# Altium PCB Smartmcu.PcbDoc
Units mil, origin at the board's own origin, x right, y up, seen from the top; angles counter-clockwise.
Board outline 2181.1 x 1846.46 mil, 4 copper layers (Top Layer, GND Layer, 3V3, Bottom Layer), stack 23.756 mil thick; 88 components, 43 nets, 255 pads, 86 vias.
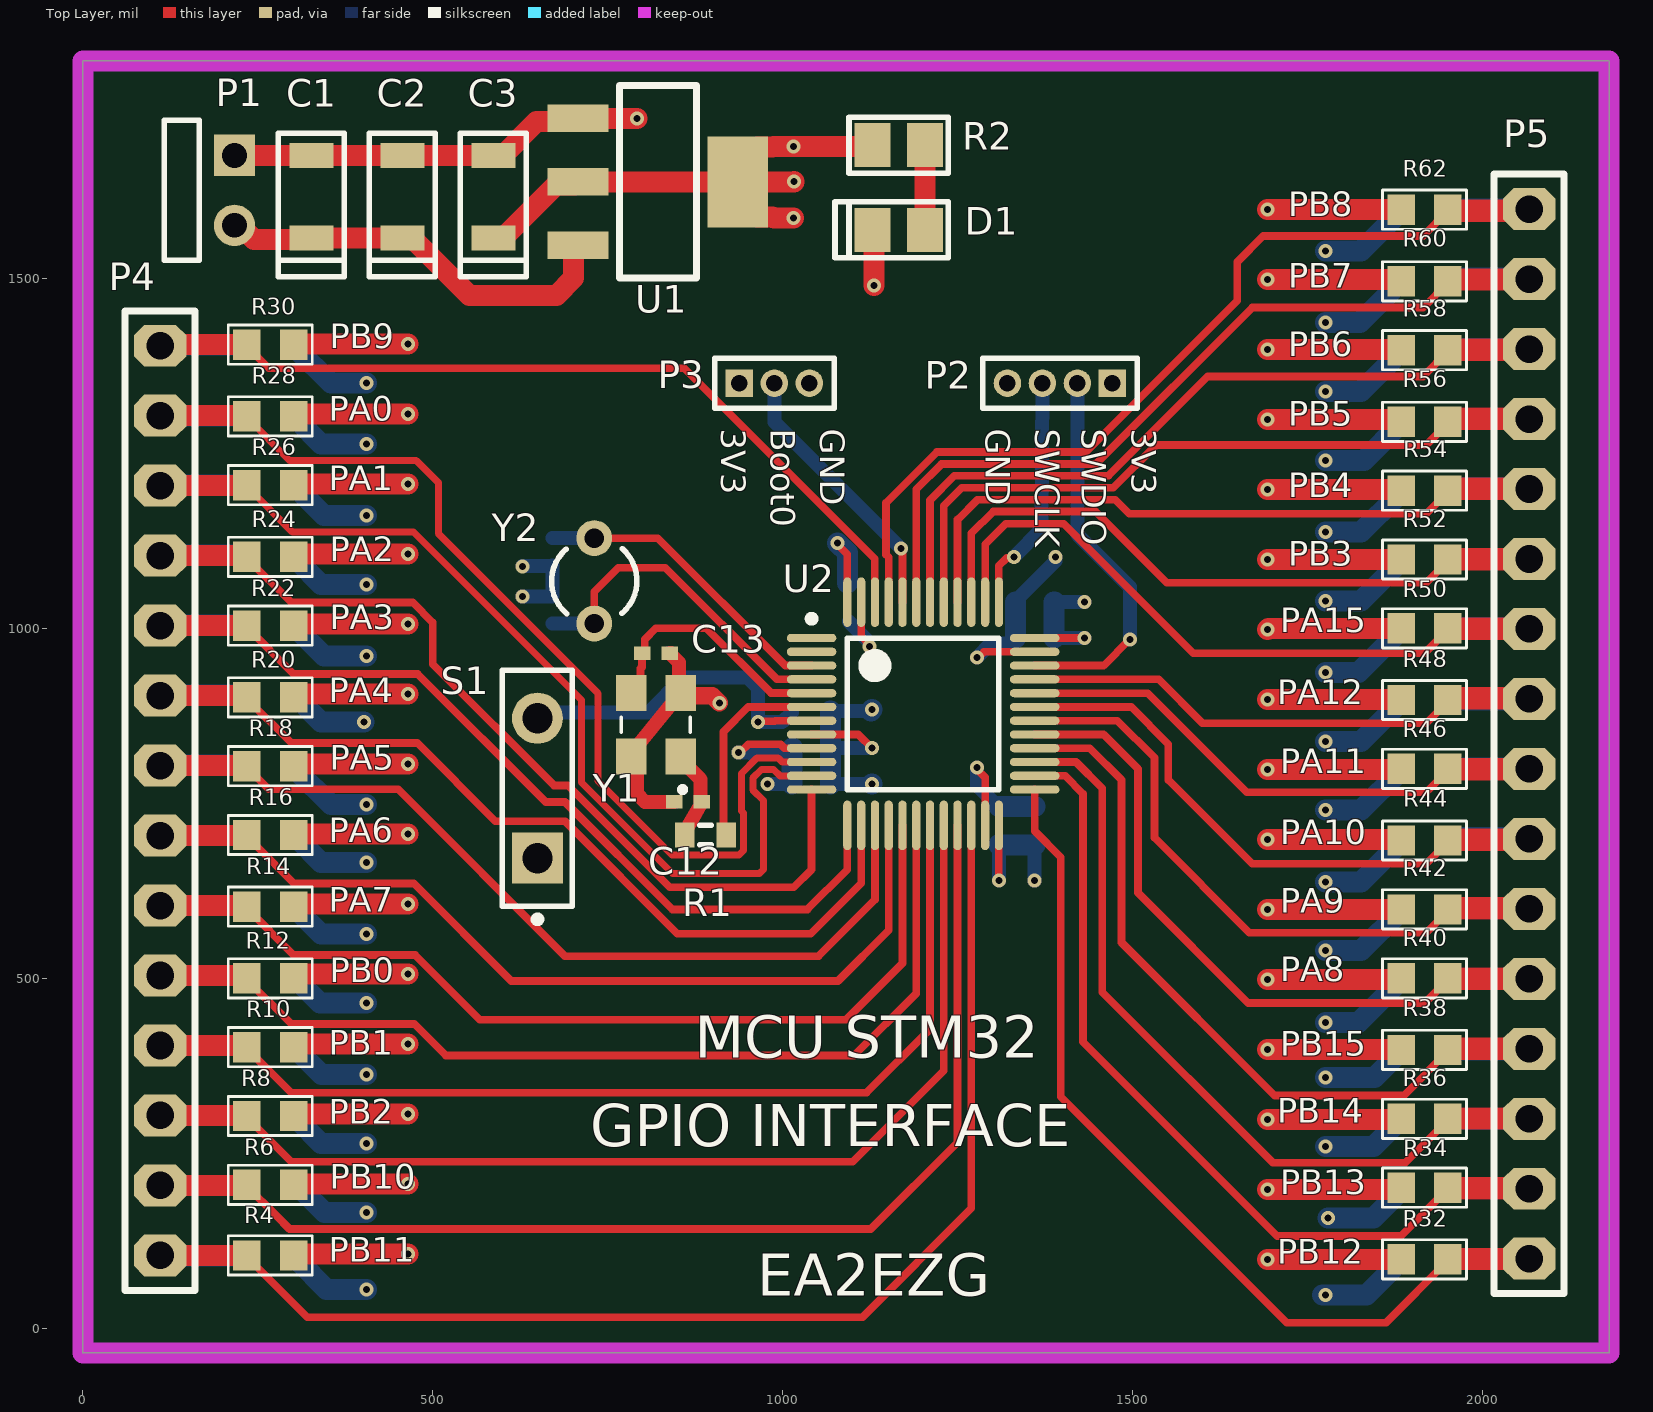
[diagram p0: Top Layer view]
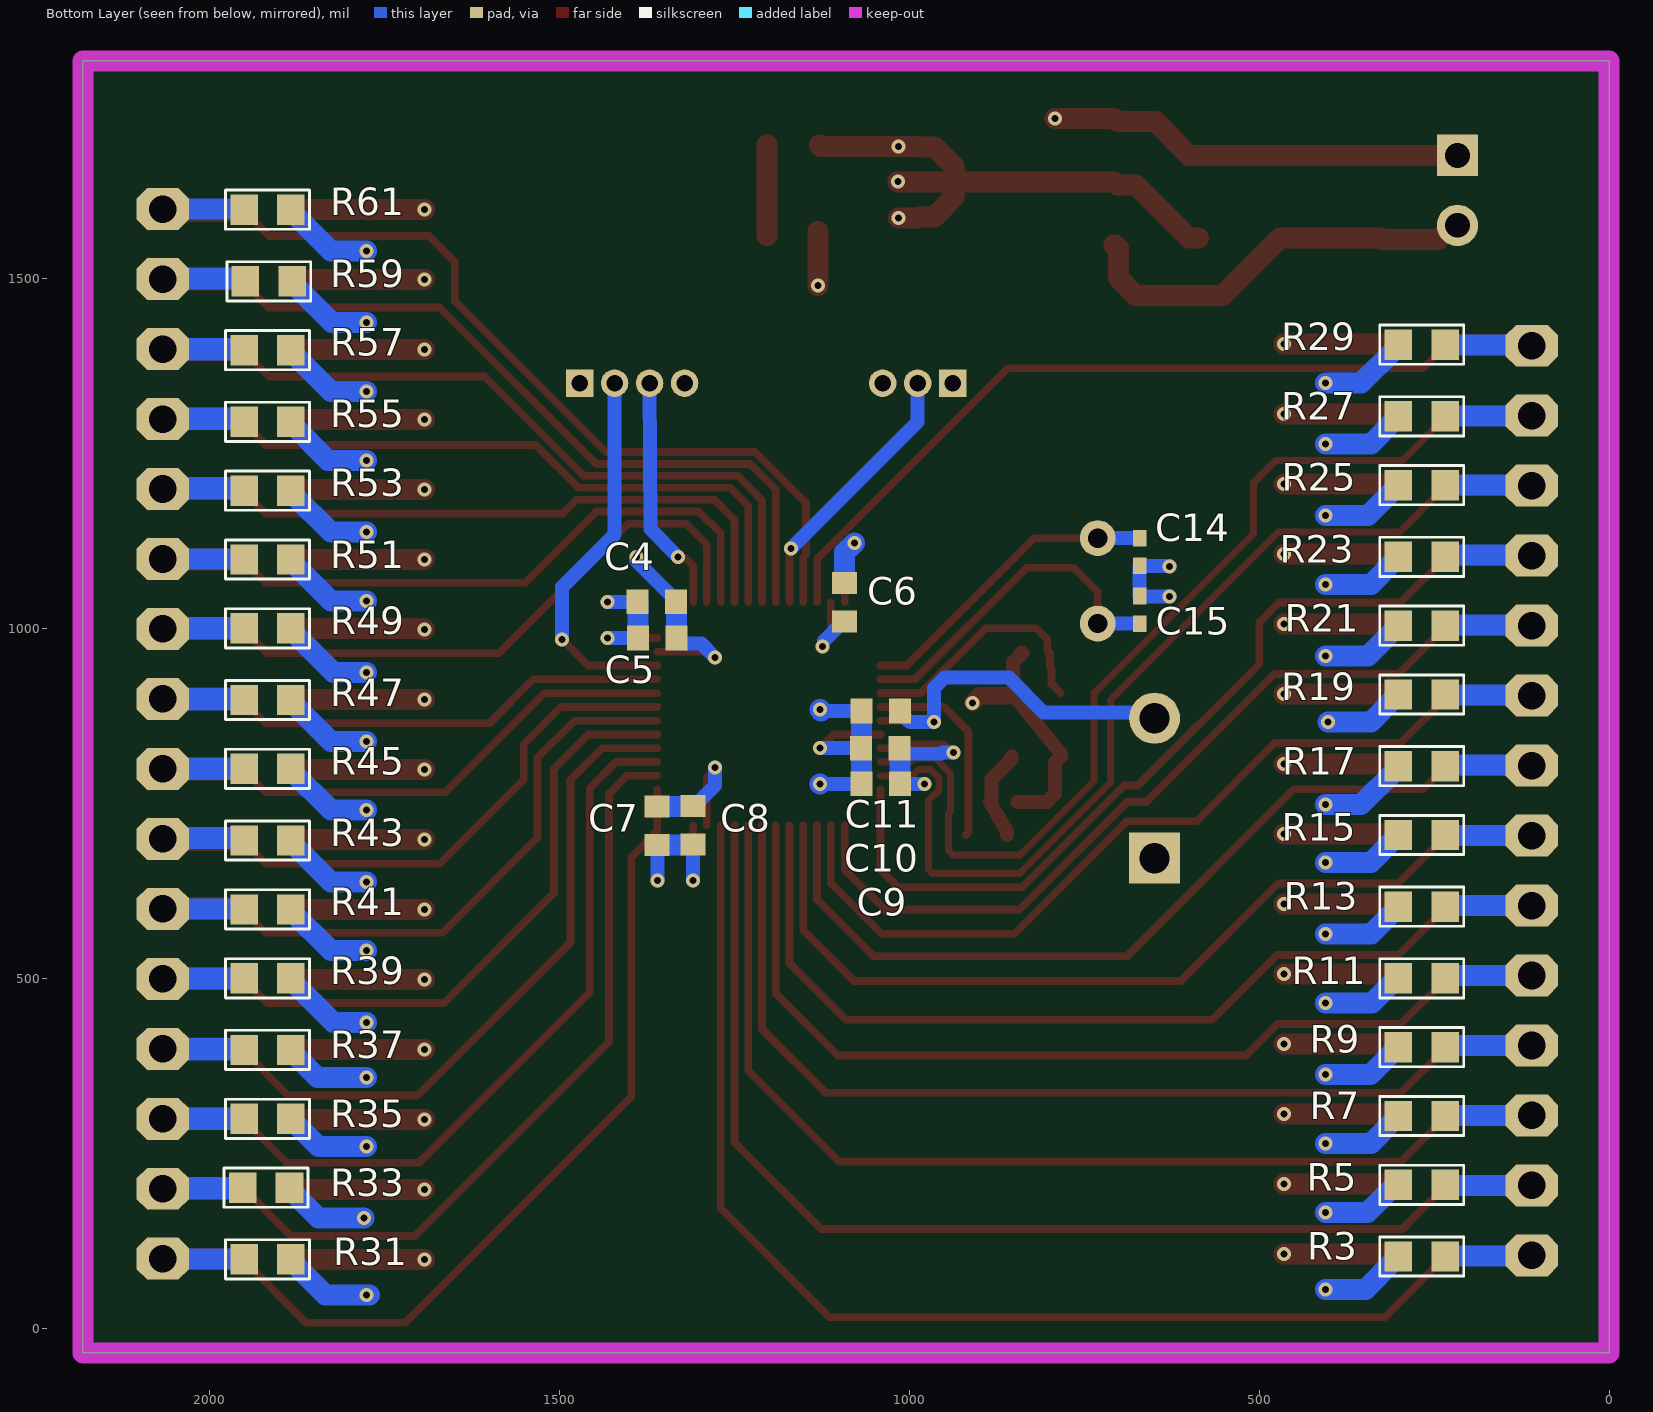
[diagram p1: Bottom Layer view, seen from below]
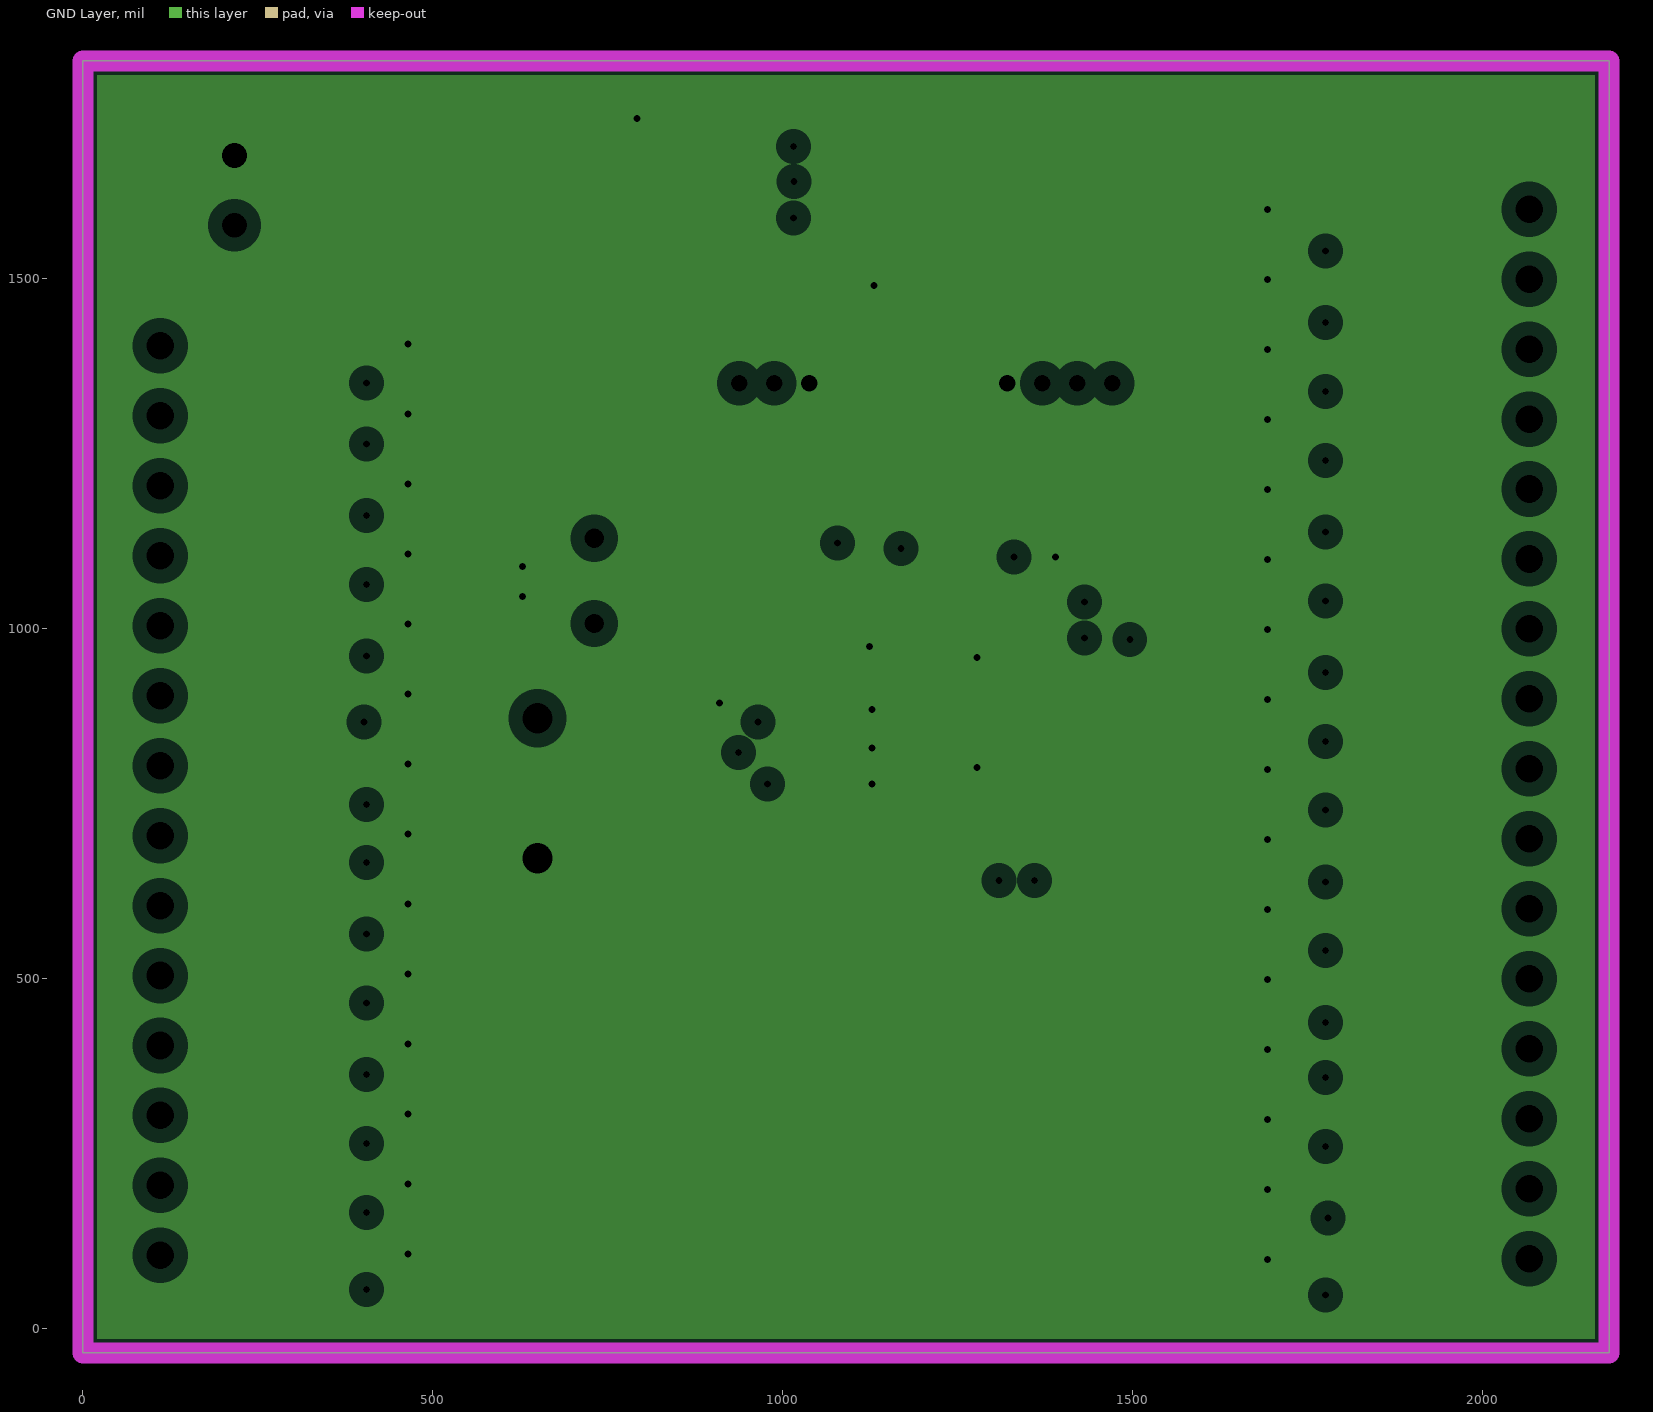
[diagram p2: GND Layer, clearances drawn from the general rule]
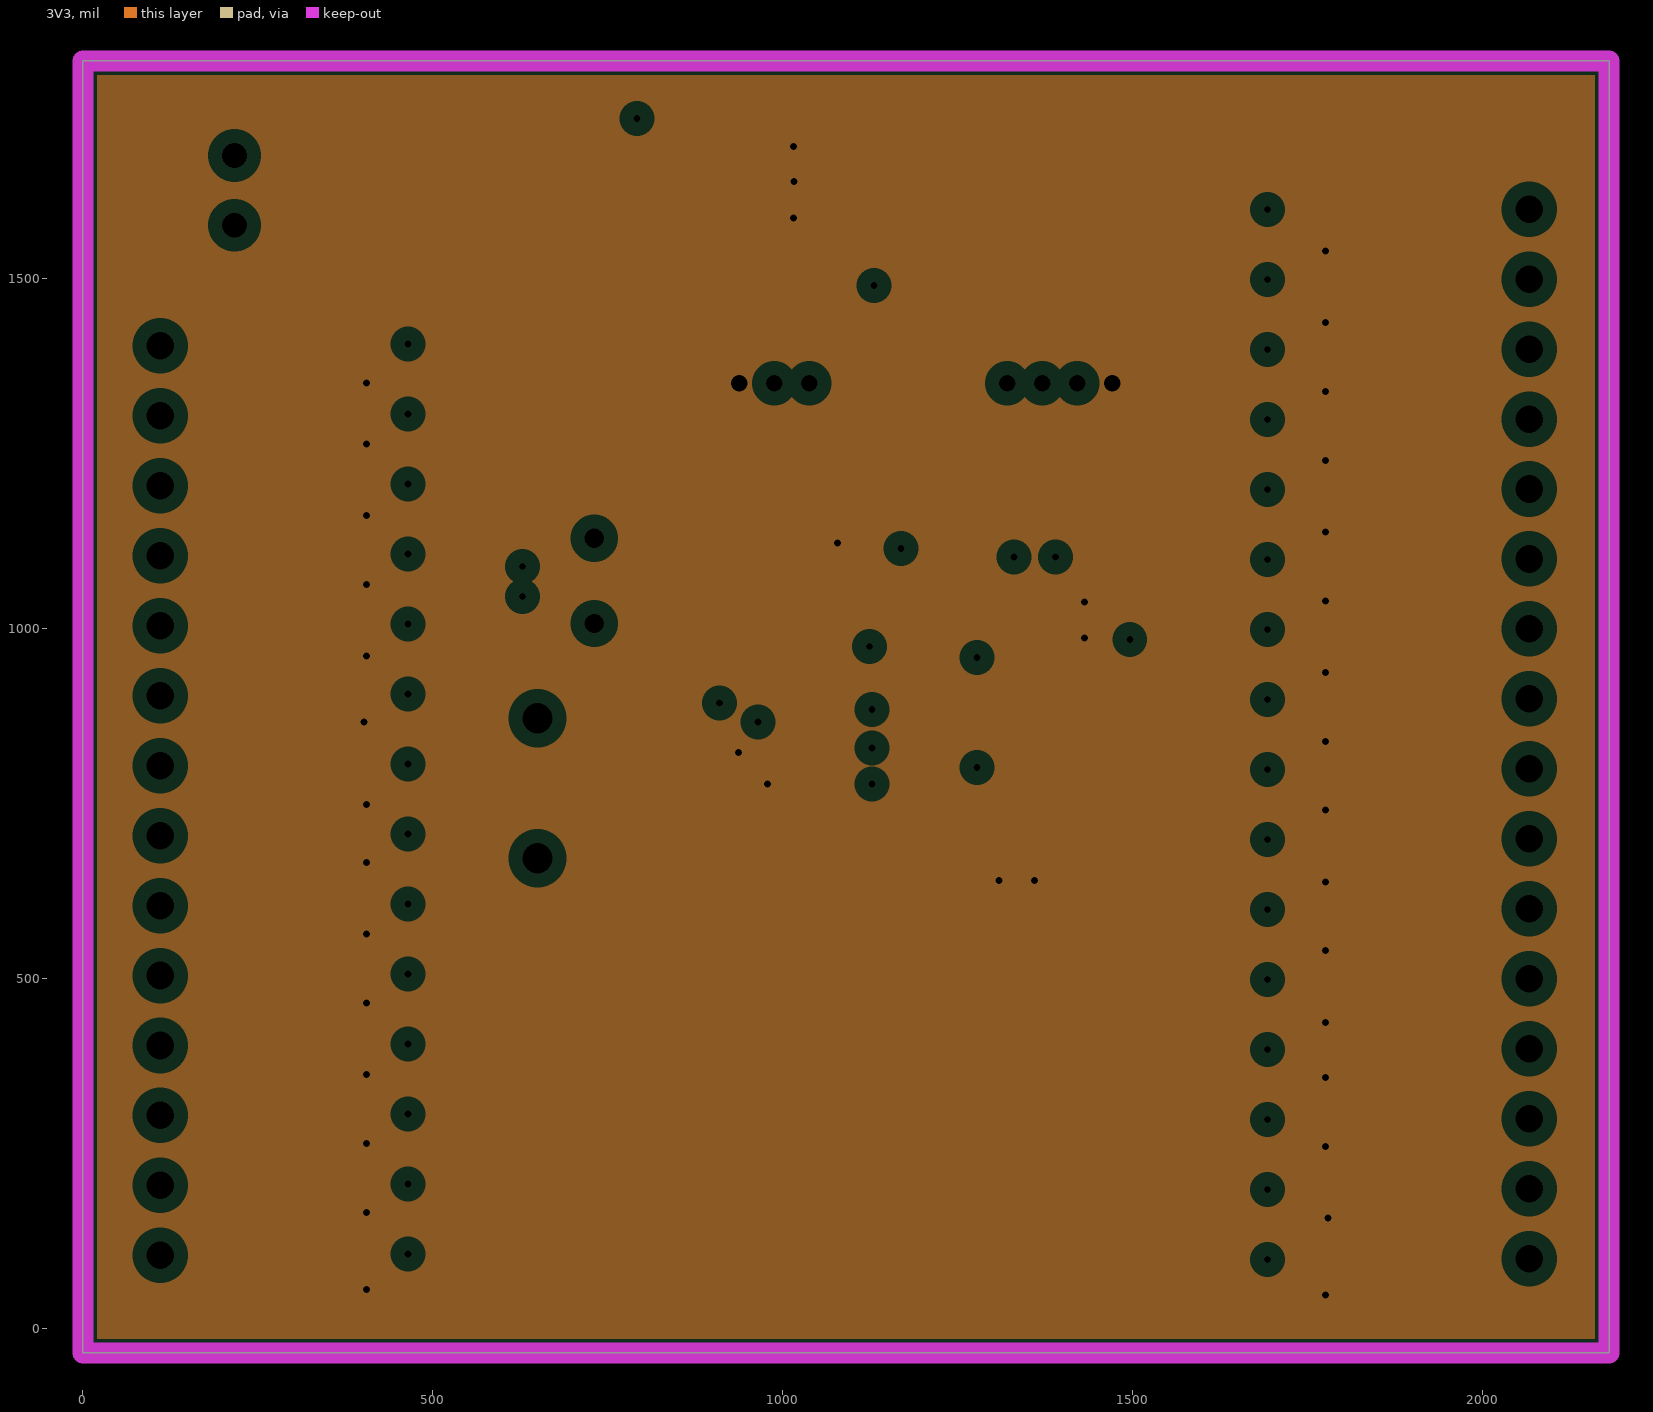
[diagram p3: 3V3, clearances drawn from the general rule]
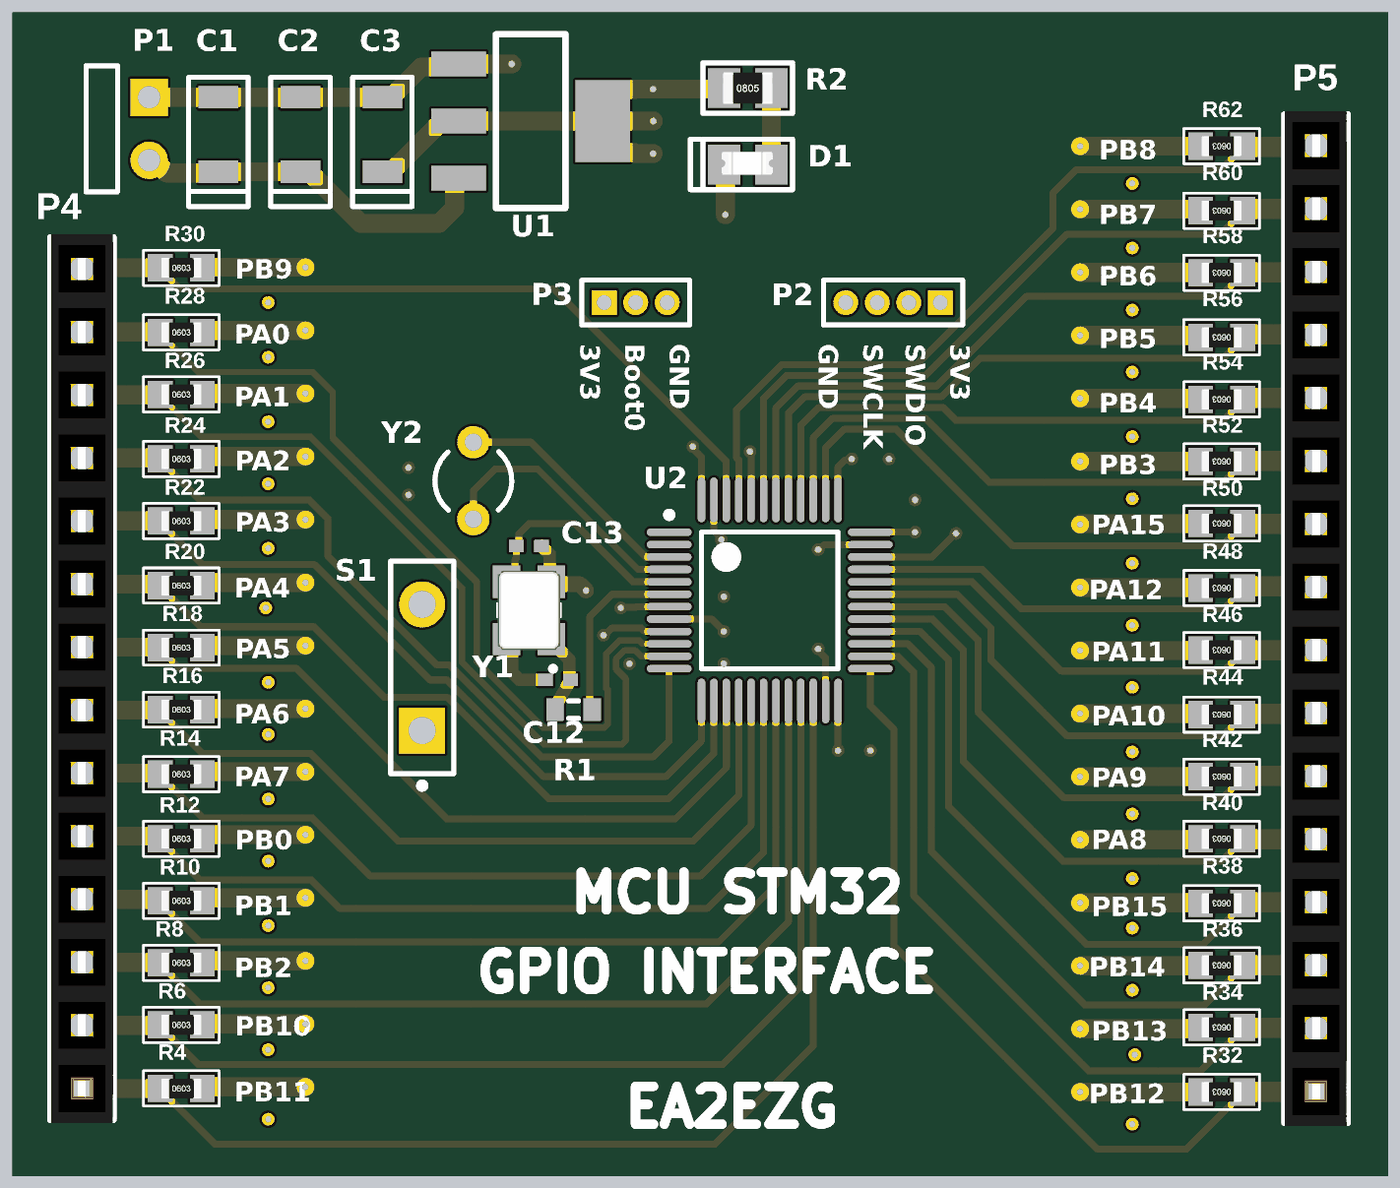
[diagram p4: 3D render of the assembled board from above, using the file's embedded part models]
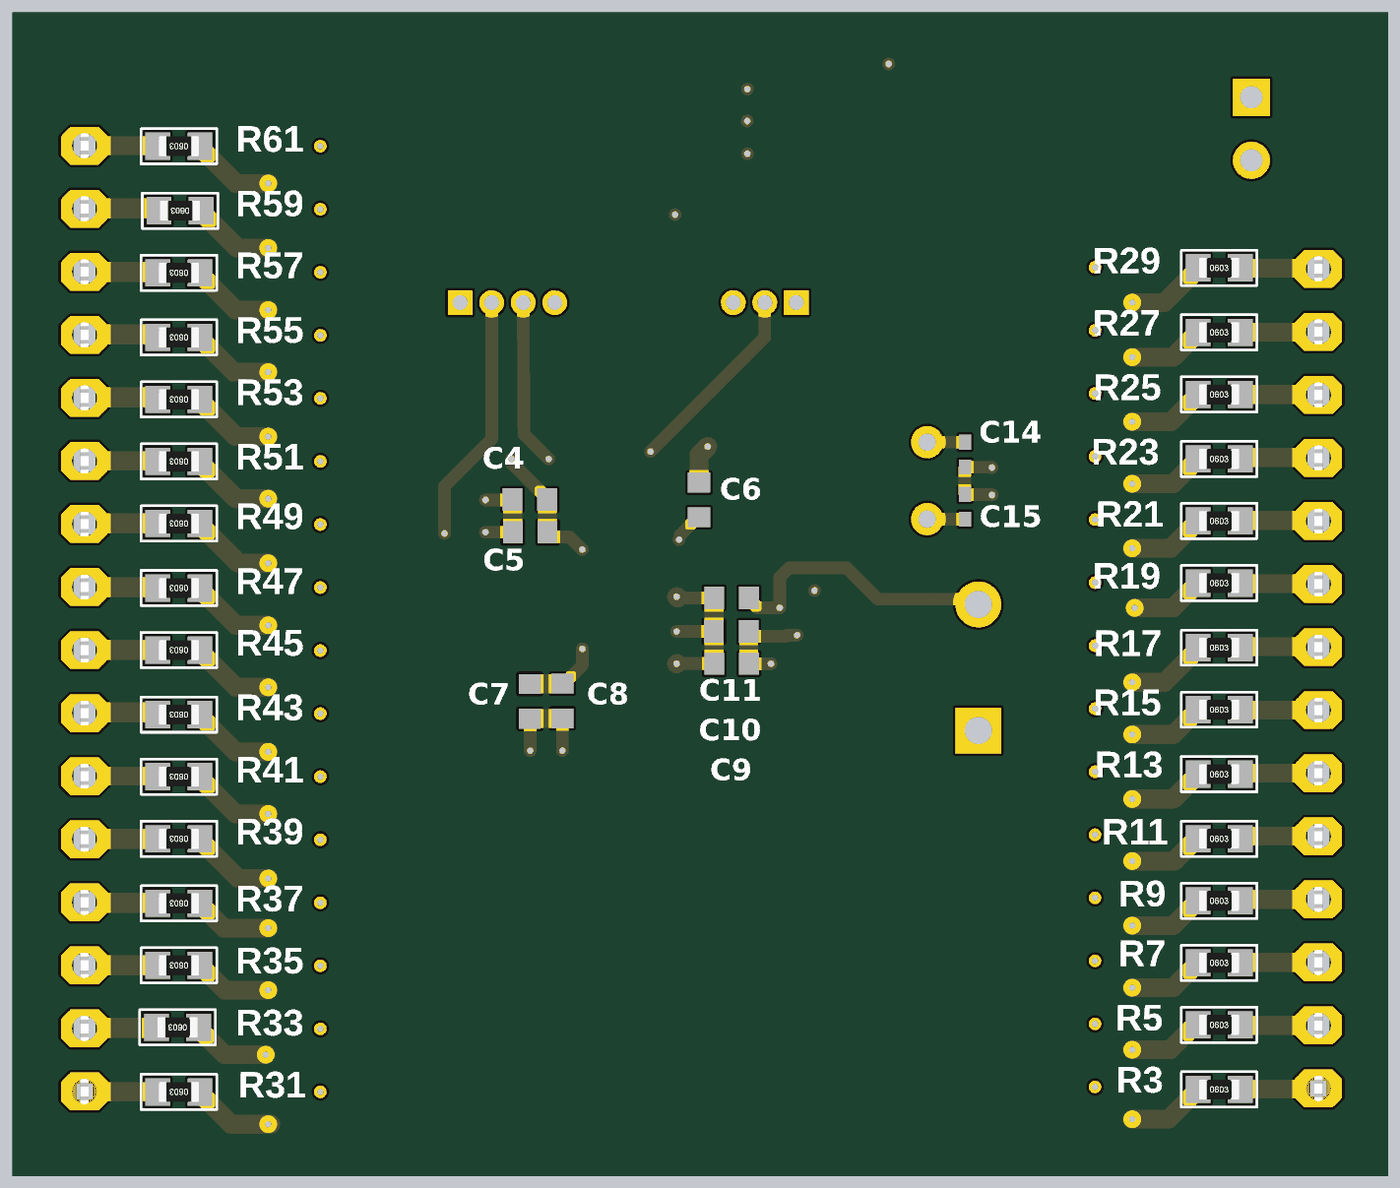
[diagram p5: 3D render of the assembled board from below, using the file's embedded part models]

## Layer stack, top to bottom
Top Solder: solder mask 0.4, Solder Resist, Dk 3.5
Top Layer: signal copper 1.4
Dielectric 2: prepreg 2.8, PP-006, Dk 4.1
GND Layer: plane copper 1.378, net GND
Dielectric 1: dielectric 12.6, FR-4, Dk 4.8
3V3: plane copper 1.378, net +3.3V
Dielectric 3: prepreg 2.8, PP-006, Dk 4.1
Bottom Layer: signal copper 1.4
Bottom Solder: solder mask 0.4, Solder Resist, Dk 3.5

## Board outline
0,-35.43 2181.1,-35.43 2181.1,1811.02 0,1811.02

## Design rules (kind name [scope] priority, off if disabled: settings)
Clearance [All] p1: gap=6 ignorepadtopadclearanceinfootprint=FALSE
ComponentClearance "Ignorar Y1/C12" [InComponent('Y1') vs InComponent('C12')] p1: gap=10 collisioncheckmode=3 verticalgap=10 showdistances=FALSE donotcheckwithout3dbody=TRUE
ComponentClearance ComponentClearance_1 [HasFootprint('4-PIN SOT') vs InComponent('U1')] p2: gap=3.94 collisioncheckmode=3 verticalgap=3.94 showdistances=FALSE
PlaneClearance [All] p1: clearance=20
PlaneConnect [All] p1: planeconnectstyle=Direct reliefexpansion=20 reliefentries=4 reliefconductorwidth=10 reliefairgap=10
PolygonConnect [All] p1: connectstyle=Direct reliefconductorwidth=10 reliefentries=4 polygonreliefangle="90 Angle" airgapwidth=10
RoutingVias [All] p1: holewidth=10 width=20 viastyle="Through Hole" minholewidth=10 minwidth=20 maxholewidth=28 maxwidth=50
ShortCircuit [All] p1: allowed=TRUE
SolderMaskExpansion [All] p1: expansion=4 istentingtop=FALSE
UnConnectedPin [All] p1:
Width [All] p1: maxlimit=40 minlimit=10 preferedwidth=10
26 further rules are at their usual default settings.

## Classes and differential pairs
component class MCU: C4 C5 C6 C7 C8 C9 C10 C11 C12 C13 C14 C15 P2 P3 P4 P5 R1 R3 R4 R5 R6 R7 R8 R9 R10 R11 R12 R13 R14 R15 R16 R17 R18 R19 R20 R21 R22 R23 R24 R25 R26 R27 R28 R29 R30 R31 R32 R33 R34 R35 R36 R37 R38 R39 R40 R41 R42 R43 R44 R45 R46 R47 R48 R49 R50 R51 R52 R53 R54 R55 R56 R57 R58 R59 R60 R61 R62 S1 U2 Y1 Y2
component class PowerSupply: C1 C2 C3 D1 P1 R2 U1

## Components (designator, comment, footprint, x,y, rotation, side; value= is the part's Value field where it differs from the comment)
C1 "Cap Semi" C1206 279.37,1707.51 r270 top value=100nF
C2 "Tantalum Cap" C1206 409.37,1707.51 r270 top value=10uF
C3 "Tantalum Cap" C1206 539.37,1707.51 r270 top value=100uF
C4 "Cap Semi" 1608[0603] 1360.79,1037.95 r0 bottom value=100nF
C5 "Cap Semi" 1608[0603] 1360.24,986.22 r0 bottom value=100nF
C6 "Cap Semi" 1608[0603] 1092.52,1037.4 r90 bottom value=100nF
C7 "Cap Semi" 1608[0603] 1360.79,717.95 r270 bottom value=100nF
C8 "Cap Semi" 1608[0603] 1309.05,718.5 r270 bottom value=4.7uF
C9 "Cap Semi" 1608[0603] 1040.79,777.95 r180 bottom value=10nF
C10 "Cap Semi" 1608[0603] 1041.34,828.74 r180 bottom value=1uF
C11 "Cap Semi" 1608[0603] 1040.94,882.05 r180 bottom value=100nF
C12 "Cap Semi" 0402 865.04,752.13 r0 top value=10pF
C13 "Cap Semi" 0402 818.9,964.57 r180 top value=10pF
C14 "Cap Semi" 0402 670.79,1109.29 r90 bottom value=10pF
C15 "Cap Semi" 0402 670.79,1026.61 r270 bottom value=10pF
D1 "LED" MY_LED_0805 1165.86,1572.47 r0 top
P1 "Battery connection 9V" HDR1X2H 216.61,1676.01 r270 top
P2 "MHDR1X4" MHDR1X4 1471.26,1350.39 r180 top
P3 "MHDR1X3" MHDR1X3 938.19,1350.39 r0 top
P4 "Header 14" MY_FE14 110.24,753.94 r90 top
P5 "Header 16" MY_FE16 2066.93,849.21 r90 top
R1 "Res3" J1-0603 889.76,704.72 r0 top value=10R
R2 "330R" MY_0805 1165.86,1690.58 r0 top
R3 "1K" MY_0603 267.72,102.36 r180 bottom
R4 "1K" MY_0603 267.72,103.94 r0 top
R5 "1K" MY_0603 267.72,204.72 r180 bottom
R6 "1K" MY_0603 267.72,204.72 r0 top
R7 "1K" MY_0603 267.72,303.15 r180 bottom
R8 "1K" MY_0603 267.72,303.15 r0 top
R9 "1K" MY_0603 267.72,401.57 r180 bottom
R10 "1K" MY_0603 267.72,401.57 r0 top
R11 "1K" MY_0603 267.72,500 r180 bottom
R12 "1K" MY_0603 267.72,500 r0 top
R13 "1K" MY_0603 267.72,602.36 r180 bottom
R14 "1K" MY_0603 267.72,602.36 r0 top
R15 "1K" MY_0603 267.72,704.72 r180 bottom
R16 "1K" MY_0603 267.72,704.72 r0 top
R17 "1K" MY_0603 267.72,803.15 r180 bottom
R18 "1K" MY_0603 267.72,803.15 r0 top
R19 "1K" MY_0603 267.72,905.51 r180 bottom
R20 "1K" MY_0603 267.72,901.57 r0 top
R21 "1K" MY_0603 267.72,1003.94 r180 bottom
R22 "1K" MY_0603 267.72,1003.94 r0 top
R23 "1K" MY_0603 267.72,1102.36 r180 bottom
R24 "1K" MY_0603 267.72,1102.36 r0 top
R25 "1K" MY_0603 267.72,1204.72 r180 bottom
R26 "1K" MY_0603 267.72,1204.72 r0 top
R27 "1K" MY_0603 267.72,1303.15 r180 bottom
R28 "1K" MY_0603 267.72,1303.15 r0 top
R29 "1K" MY_0603 267.72,1405.51 r180 bottom
R30 "1K" MY_0603 267.72,1405.51 r0 top
R31 "1K" MY_0603 1917.32,98.43 r0 bottom
R32 "1K" MY_0603 1917.32,98.43 r180 top
R33 "1K" MY_0603 1919.29,200.79 r0 bottom
R34 "1K" MY_0603 1917.32,200.79 r180 top
R35 "1K" MY_0603 1917.32,299.21 r0 bottom
R36 "1K" MY_0603 1917.32,299.21 r180 top
R37 "1K" MY_0603 1917.32,397.64 r0 bottom
R38 "1K" MY_0603 1917.32,397.64 r180 top
R39 "1K" MY_0603 1917.32,500 r0 bottom
R40 "1K" MY_0603 1917.32,500 r180 top
R41 "1K" MY_0603 1917.32,598.43 r0 bottom
R42 "1K" MY_0603 1917.32,598.43 r180 top
R43 "1K" MY_0603 1917.32,696.85 r0 bottom
R44 "1K" MY_0603 1917.32,696.85 r180 top
R45 "1K" MY_0603 1917.32,799.21 r0 bottom
R46 "1K" MY_0603 1917.32,799.21 r180 top
R47 "1K" MY_0603 1917.32,897.64 r0 bottom
R48 "1K" MY_0603 1917.32,897.64 r180 top
R49 "1K" MY_0603 1917.32,1000 r0 bottom
R50 "1K" MY_0603 1917.32,1000 r180 top
R51 "1K" MY_0603 1917.32,1098.43 r0 bottom
R52 "1K" MY_0603 1917.32,1098.43 r180 top
R53 "1K" MY_0603 1917.32,1196.85 r0 bottom
R54 "1K" MY_0603 1917.32,1196.85 r180 top
R55 "1K" MY_0603 1917.32,1295.28 r0 bottom
R56 "1K" MY_0603 1917.32,1295.28 r180 top
R57 "1K" MY_0603 1917.32,1397.64 r0 bottom
R58 "1K" MY_0603 1917.32,1397.64 r180 top
R59 "1K" MY_0603 1915.35,1496.06 r0 bottom
R60 "1K" MY_0603 1917.32,1496.06 r180 top
R61 "1K" MY_0603 1917.32,1598.43 r0 bottom
R62 "1K" MY_0603 1917.32,1598.43 r180 top
S1 "SW-PB" SPST-2 649.61,771.65 r90 top
U1 "Low dropout voltage regulator" "4-PIN SOT" 766.61,1776.01 r270 top
U2 "STM32F103C8T6TR" STM-LQFP48_N 1200.79,877.95 r0 top
Y1 "ECS-80-10-33-CHN-TR" XTAL_ECS-80-10-33-CHN-TR 818.9,862.2 r90 top
Y2 "XTAL" R38 730.79,1067.95 r0 top

## Footprints (in the part's own frame and the unit in brackets; to place one, negate y for a bottom-side part, rotate by r counter-clockwise, add the part's x,y. Pads: shape width x height; smd on the part's side, far side on the other; paste and mask are expansions set on the pad)
"4-PIN SOT" [mm] "lm1117"
  rect 1x2.2 smd: 0(5.8,-1.5) 1(1.2,-1.5) 2(3.5,-1.5)
  rect 3.3x2.2 smd: 2(3.5,4.3)
  silkscreen extent 0,0 7,2.8
0402 [mm] "Chip Capacitor, Body 1.0x0.5mm, IPC High Density"
  rect 0.6x0.5 smd: 1(-0.5,0) 2(0.5,0)
  body extent -0.55,-0.3 0.55,0.3, height 1.3
1608[0603] [mm] "Chip Capacitor, Body 1.6x0.8mm, IPC High Density"
  rect 0.8x0.9 smd: 1(-0.7,0) 2(0.7,0)
  body extent -0.87,-0.48 0.87,0.48, height 1.3
C1206 [mm] "Tantalum Cap"
  rect 0.9x1.6 smd: 1(0.8,1.2) 2(3.8,1.2)
  silkscreen extent 0,0 5.2,2.4
HDR1X2H [mm] "Connector; Header; 2 Position; Right Angle"
  rect 1.5x1.5 hole 0.9: 1(0,0)
  round 1.5 hole 0.9: 2(2.54,0)
  silkscreen extent -1.27,-2.54 3.81,-1.27
J1-0603 [mm] "Chip Resistor, Body 1.6x0.8mm, IPC High Density"
  rect 0.7x0.9 smd: 1(-0.75,0) 2(0.75,0)
  silkscreen extent -0.2,-0.35 0.2,0.35, body extent -0.85,-0.48 0.85,0.48, height 0.9
MHDR1X3 [mm] "Connector; Header; 3 Position"
  rect 1x1 hole 0.6: 1(0,0)
  round 1 hole 0.6: 2(1.27,0) 3(2.54,0)
  silkscreen extent -0.9,-0.9 3.44,0.9
MHDR1X4 [mm] "Connector; Header; 4 Position"
  rect 1x1 hole 0.6: 1(0,0)
  round 1 hole 0.6: 2(1.27,0) 3(2.54,0) 4(3.81,0)
  silkscreen extent -0.9,-0.9 4.71,0.9
MY_0603 [mm]
  rect 1x1.1 smd: 1(-0.85,0) 2(0.85,0)
  silkscreen extent -1.52,-0.71 1.52,0.71, body extent -0.8,-0.4 0.8,0.4, height 0.44
MY_0805 [mm]
  rect 1.3x1.6 smd: 1(-0.95,0) 2(0.95,0)
  silkscreen extent -1.8,-1.02 1.8,1.02, body extent -1,-0.62 1,0.63, height 0.59
MY_FE14 [mil]
  oct 60x75 hole 39.37: 1(-650,0) 2(-550,0) 3(-450,0) 4(-350,0) 5(-250,0) 6(-150,0) 7(-50,0) 8(50,0) 9(150,0) 10(250,0) 11(350,0) 12(450,0) 13(550,0) 14(650,0)
  silkscreen extent -700,-50 700,50, body extent -705,-49 705,49, height 335
MY_FE16 [mil]
  oct 60x75 hole 39.37: 1(-750,0) 2(-650,0) 3(-550,0) 4(-450,0) 5(-350,0) 6(-250,0) 7(-150,0) 8(-50,0) 9(50,0) 10(150,0) 11(250,0) 12(350,0) 13(450,0) 14(550,0) 15(650,0) 16(750,0)
  silkscreen extent -800,-50 800,50, body extent -805,-49 805,49, height 335
MY_LED_0805 [mm]
  rect 1.3x1.6 smd: A(0.95,-0.076) K(-0.95,-0.076)
  silkscreen extent -2.31,-1.09 1.8,0.94, body extent -1.06,-0.48 1.01,0.42, height 0.86
R38 [mm] "Crystal, Thru-Hole; 2 Leads; Body 3.1 x 8.2 mm (Dia.xH)"
  round 1.3 hole 0.7: 1(0,1.55) 2(0,-1.55)
  silkscreen extent -1.55,-1.19 1.55,1.17
SPST-2 [mm] "Switch; 2 Leads"
  rect 1.85x1.85 hole 1.1: 1(-2.54,0)
  round 1.85 hole 1.1: 2(2.54,0)
  silkscreen extent -4.89,-1.27 4.28,1.27
STM-LQFP48_N [mm] "QFP, 48-Leads, Body 7x7mm, Pitch 0.5mm, IPC Medium Density"
  oval 1.8x0.3 smd: 1(-4.05,2.75) 2(-4.05,2.25) 3(-4.05,1.75) 4(-4.05,1.25) 5(-4.05,0.75) 6(-4.05,0.25) 7(-4.05,-0.25) 8(-4.05,-0.75) 9(-4.05,-1.25) 10(-4.05,-1.75) 11(-4.05,-2.25) 12(-4.05,-2.75) 25(4.05,-2.75) 26(4.05,-2.25) 27(4.05,-1.75) 28(4.05,-1.25) 29(4.05,-0.75) 30(4.05,-0.25) 31(4.05,0.25) 32(4.05,0.75) 33(4.05,1.25) 34(4.05,1.75) 35(4.05,2.25) 36(4.05,2.75)
  oval 0.3x1.8 smd: 13(-2.75,-4.05) 14(-2.25,-4.05) 15(-1.75,-4.05) 16(-1.25,-4.05) 17(-0.75,-4.05) 18(-0.25,-4.05) 19(0.25,-4.05) 20(0.75,-4.05) 21(1.25,-4.05) 22(1.75,-4.05) 23(2.25,-4.05) 24(2.75,-4.05) 37(2.75,4.05) 38(2.25,4.05) 39(1.75,4.05) 40(1.25,4.05) 41(0.75,4.05) 42(0.25,4.05) 43(-0.25,4.05) 44(-0.75,4.05) 45(-1.25,4.05) 46(-1.75,4.05) 47(-2.25,4.05) 48(-2.75,4.05)
  silkscreen extent -4.17,-2.75 2.75,3.57, body extent -3.5,-3.5 3.5,3.5, height 1.6
XTAL_ECS-80-10-33-CHN-TR [mm]
  rect 1.3x1.1 smd: 1(-1.15,-0.9) 2(1.15,-0.9) 3(1.15,0.9) 4(-1.15,0.9)
  silkscreen extent -2.45,-1.25 0.27,1.25, body extent -1.6,-1.25 1.6,1.25, height 0.8

## Part data
C1: "Capacitor (Semiconductor SIM Model)  100nF", LatestRevisionDate=29-May-2009, LatestRevisionNote="IPC-7351 Footprint Added.", PackageDescription="Chip Capacitor", PackageReference=C1206, Published=8-Jun-2000, Publisher="Altium Limited"
C2 C3: library part "Cap Pol1", "Polarized Capacitor (Radial)", LatestRevisionDate=17-Jul-2002, LatestRevisionNote="Re-released for DXP Platform.", PackageDescription="Polarized Capacitor (Radial); 2 Leads", PackageReference=RB7.6-15, Published=8-Jun-2000, Publisher="Altium Limited"
C4 C5 C6 C7 C8 C9 C10 C11 C12 C13 C14 C15: "Capacitor (Semiconductor SIM Model)", LatestRevisionDate=29-May-2009, LatestRevisionNote="IPC-7351 Footprint Added.", PackageDescription="Chip Capacitor", PackageReference=C1206, Published=8-Jun-2000, Publisher="Altium Limited"
D1: "Typical INFRARED GaAs LED", ASiD Part Number=LED-AS
P1: library part "Header 2H", "Header, 2-Pin, Right Angle", LatestRevisionDate=17-Jul-2002, LatestRevisionNote="Re-released for DXP Platform.", Publisher="Altium Limited"
P2: "Header, 4-Pin", LatestRevisionDate=17-Jul-2002, LatestRevisionNote="Re-released for DXP Platform.", Publisher="Altium Limited"
P3: "Header, 3-Pin", LatestRevisionDate=17-Jul-2002, LatestRevisionNote="Re-released for DXP Platform.", Publisher="Altium Limited"
P4: "Header, 14-Pin", ASiD Part Number="Header 14-AS"
P5: "Header, 16-Pin", ASiD Part Number="Header 16-AS"
R1: "Resistor", LatestRevisionDate=29-May-2009, LatestRevisionNote="IPC-7351 Footprint Added.", PackageDescription="Chip Resistor", PackageReference=J1-0603, Published=8-Jun-2000, Publisher="Altium Limited"
R2 R3 R4 R5 R6 R7 R8 R9 R10 R11 R12 R13 R14 R15 R16 R17 R18 R19 R20 R21 R22 R23 R24 R25 R26 R27 R28 R29 R30 R31 R32 R33 R34 R35 R36 R37 R38 R39 R40 R41 R42 R43 R44 R45 R46 R47 R48 R49 R50 R51 R52 R53 R54 R55 R56 R57 R58 R59 R60 R61 R62: library part Res, "Standard resistor", ASiD Part Number=Res-AS
S1: "Switch", LatestRevisionDate=17-Jul-2002, LatestRevisionNote="Re-released for DXP Platform.", PackageDescription="Switch; 2 Leads", PackageReference=SPST-2, Published=24-Mar-1999, Publisher="Altium Limited"
U1: library part lm1117, "The LM1117 is a low dropout voltage regulator with a  / dropout of 1.2 V at 800 mA of load current. / The LM1117 is available in an adjustable version,  / which can set the output voltage from 1.25 V to 13.8 V  / with only two external resistors. In addition, the device  / is available in five fixed voltages, 1.8 V, 2.5 V, 3.3 V,  / and 5 V.", output voltage=3.3V, ComponentLink1Description=Datasheet, ComponentLink1URL=https://www.bing.com/ck/a?!&&p=a5a244ffbc41c431JmltdHM9MTY5MTc5ODQwMCZpZ3VpZD0zMWY2OWVhOS1hOGQ2LTYwMDQtMGU2MC04Y2M4YTk3ZTYxNDYmaW5zaWQ9NTE5NA&ptn=3&hsh=3&fclid=31f69ea9-a8d6-6004-0e60-8cc8a97e6146&psq=lm1117+pdf&u=a1aHR0cHM6Ly93d3cudGkuY29tL2xpdC9kcy9zeW1saW5rL2xtMTExNy5wZGY&ntb=1, Modelo=lm1117
U2: "ARM Cortex-M3 32-bit MCU, 64 KB Flash, 20 KB Internal RAM, 37 I/Os, 48-pin LQFP, -40 to 85 degC, Tape and Reel", I/Os (High Current)=37, Operating Frequency(F) (Processor speed) (MHz)=72, Supplier Part Number 1=STM32F103C8T6TR-ND, Supply Voltage(Vcc) min (V)=2, A/D Converter="2x12-bit (10 Channel)", ComponentLink1Description="Manufacturer URL", ComponentLink1URL=http://www.st.com/web/en/home.html, ComponentLink2Description=Datasheet, ComponentLink2URL=http://www.st.com/st-web-ui/static/active/en/resource/technical/document/datasheet/CD00161566.pdf, ComponentLink3Description="Package Specification", ComponentLink3URL=http://www.st.com/st-web-ui/static/active/en/resource/technical/document/datasheet/DM00058181.pdf, Core="ARM Cortex-M3", DatasheetVersion="Rev. 16", FLASH Size (Prog) (kB)=64, Internal RAM Size (kB)=20, Mounting Technology="Surface Mount", PackageDescription="48-Pin Low Profile Quad Flat Package, 7 x 7 mm Body, 0.5 mm Pitch", PackageReference=LQFP48, PackageVersion="Rev. 6, 06/2013", Packing="Tape and Reel", PartNumber=STM32F103C8T6TR, Supplier 1=Digi-Key, Supplier 2=Mouser, Supplier Part Number 2=511-STM32F103C8T6TR
Y1: "8 MHz Â±10ppm Crystal 10pF 400 Ohms 4-SMD, No Lead", Package="SMD-4 ECS International", Availability="In Stock", Check_prices=https://www.snapeda.com/parts/ECS-80-10-33-CHN-TR/ECS+Inc./view-part/?ref=eda, MF="ECS Inc.", MP=ECS-80-10-33-CHN-TR, Price=None, Purchase-URL=https://pricing.snapeda.com/search/part/ECS-80-10-33-CHN-TR/?ref=eda, SnapEDA_Link=https://www.snapeda.com/parts/ECS-80-10-33-CHN-TR/ECS+Inc./view-part/?ref=snap
Y2: "Crystal Oscillator", LatestRevisionDate=17-Jul-2002, LatestRevisionNote="Re-released for DXP Platform.", PackageDescription="Crystal, Thru-Hole; 2 Leads; Body 3.1 x 8.2 mm (Dia.xH)", PackageReference=R38, Published=8-Jun-2000, Publisher="Altium Limited"

## Via types
v1: diameter 20, hole 10, Top Layer to Bottom Layer, 60 vias
v2: diameter 20, hole 10, Top Layer to Bottom Layer, tented both sides, 26 vias

## Nets (pads, with @x,y where several pads share a name; then routed paths per layer and width w, separated by ;. In a path a pad name is that pad's centre, name@x,y a point inside that pad or via, vN(x,y) a via of type N, cw(c..) or ccw(c..) an arc to the next point about the centre after c; other vN are vias at no path point)
32KHz_01: C14.2 U2.3 Y2.1 | length 446
  Top Layer w11: Y2.1 821.57,1128.98 1003.55,947.01 1041.18,947.01 U2.3
  Bottom Layer w20: C14.2 Y2.1
32KHz_02: C15.2 U2.4 Y2.2 | length 496.3
  Top Layer w11: Y2.2 730.79,1052.2 765.35,1086.77 832.28,1086.77 991.89,927.17 U2.4
  Bottom Layer w20: C15.2 Y2.2
+3.3V: C3.2 C4.2 C5.2 C6.2 C7.2 C8.2 C9.2 C10.2 P2.1 P3.1 R2.1 R3.1 R5.1 R7.1 R9.1 R11.1 R13.1 R15.1 R17.1 R19.1 R21.1 R23.1 R25.1 R27.1 R29.1 R31.1 R33.1 R35.1 R37.1 R39.1 R41.1 R43.1 R45.1 R47.1 R49.1 R51.1 R53.1 R55.1 R57.1 R59.1 R61.1 U1.2 U2.9 U2.24 U2.36 U2.48 | length 5432.2
  Top Layer w11: v2(937.01,822.83) 939.44,822.83 951.25,834.65 996.92,834.65 1002.67,828.9 1041.18,828.9 U2.9 ; v2(1078.74,1122.05) 1078.74,1119.61 1092.52,1105.83 U2.48 ; v2(1309.05,639.76) U2.24 ; U2.36 v2(1431.1,986.22)
  Top Layer w30: C3.2 600.39,1557.9 676.02,1633.53 702.87,1633.53 707.56,1638.21 U1.2@935.9,1638.21 ; v2(1015.75,1586.61) 987.5,1586.61 985.86,1588.25 964.21,1588.25 935.9,1616.56 U1.2@935.9,1638.21 ; v2(1016.12,1638.35) 1015.98,1638.21 U1.2@935.9,1638.21 ; R2.1 1126.86,1688.98 v2(1015.75,1688.98) 986.67,1688.98 985.86,1688.18 964.21,1688.18 935.9,1659.87 U1.2@935.9,1638.21
  Bottom Layer w11: C9.2@1012.83,777.56 C9.2 ; C7.2@1360.24,689.84 C7.2 ; C4.2 C4.2@1388.9,1037.4
  Bottom Layer w20: v2(937.01,822.83) 952.76,822.83 954.72,820.87 C10.2@1005.91,820.87 ; v2(978.35,777.56) C9.2@1012.83,777.56 ; v2(1309.05,639.76) C8.2 ; v2(1360.24,639.76) C7.2@1360.24,689.84 ; C5.2 v2(1431.1,986.22) ; C4.2@1388.9,1037.4 v2(1431.1,1037.4)
  Bottom Layer w30: R3.1 301.18,100.39 305.87,95.71 307.83,95.71 348.43,55.12 v1(405.51,55.12) ; R7.1 301.18,301.18 305.87,296.5 307.83,296.5 340.55,263.78 v1(405.51,263.78) ; R15.1 301.18,702.76 305.87,698.07 307.83,698.07 340.55,665.35 v1(405.51,665.35) ; R19.1 301.18,903.54 305.87,898.86 307.83,898.86 340.55,866.14 v1(401.57,866.14) ; R21.1 301.18,1001.97 305.87,997.28 307.83,997.28 344.49,960.63 v1(405.51,960.63) ; R25.1 301.18,1202.76 305.87,1198.07 307.83,1198.07 344.49,1161.42 v1(405.51,1161.42) ; R27.1 301.18,1301.18 305.87,1296.5 307.83,1296.5 340.55,1263.78 v1(405.51,1263.78) ; R5.1@305.87,204.72 305.87,198.07 312.52,198.07 345.24,165.35 v1(405.51,165.35) ; R9.1@305.87,395.71 305.87,394.92 308.62,394.92 341.34,362.2 v1(405.51,362.2) ; R11.1@305.87,495.71 305.87,493.35 310.2,493.35 338.98,464.57 v1(405.51,464.57) ; R13.1@305.87,595.71 307.83,595.71 340.55,562.99 v1(405.51,562.99) ; R17.1@305.87,796.5 354.33,748.03 v1(405.51,748.03) ; R23.1@305.87,1095.71 307.83,1095.71 340.55,1062.99 v1(405.51,1062.99) ; R29.1@305.87,1398.86 354.33,1350.39 v1(405.51,1350.39) ; C9.2 1013.5,778.23 1013.5,828.46 C10.2 ; v2(1078.74,1122.05) 1092.52,1108.27 C6.2 ; C8.2 1309.33,690.67 1360.51,690.67 C7.2 ; C5.2 1388.07,986.5 1388.07,1037.68 C4.2 ; v1@1771.65,47.24 v1(1775.59,47.24) 1834.65,47.24 1883.86,96.46 R31.1 ; v1(1775.59,259.84) 1844.49,259.84 1877.2,292.56 1879.17,292.56 1883.86,297.24 R35.1 ; v1(1775.59,358.27) 1845.67,358.27 1878.39,390.98 1879.17,390.98 1883.86,395.67 R37.1@1883.86,396.46 ; v1(1775.59,437.01) 1822.83,437.01 1879.17,493.35 1880.75,493.35 R39.1@1883.86,496.46 ; v1(1775.59,539.37) 1826.77,539.37 R41.1@1883.86,596.46 ; v1(1775.59,637.8) 1826.77,637.8 1883.86,694.88 R43.1@1883.86,696.46 ; v1(1775.59,740.16) 1826.77,740.16 1883.07,796.46 R45.1@1883.86,796.46 ; v1(1775.59,838.58) 1826.77,838.58 1883.86,895.67 R47.1@1883.86,896.46 ; v1(1775.59,937.01) 1822.83,937.01 1882.28,996.46 R49.1@1883.86,996.46 ; v1(1775.59,1039.37) 1826.77,1039.37 R51.1@1883.86,1096.46 ; v1(1775.59,1137.8) 1826.77,1137.8 1879.17,1190.2 1879.17,1191.77 R53.1@1883.86,1196.46 ; v1(1775.59,1240.16) 1830.71,1240.16 1883.86,1293.31 R55.1@1883.86,1296.46 ; v1(1775.59,1338.58) 1826.77,1338.58 1883.86,1395.67 R57.1@1883.86,1396.46 ; v1(1775.59,1437.01) 1824.8,1437.01 1883.86,1496.06 R59.1@1883.86,1496.46 ; v1(1775.59,1539.37) 1826.77,1539.37 R61.1@1883.86,1596.46 ; v1(1779.53,157.48) 1844.49,157.48 1881.14,194.13 1881.54,194.13 R33.1@1883.86,196.46
+9V: C1.2 C2.2 P1.2 U1.0 | length 588.5
  Top Layer w30: P1.2 224.47,1576.01 244.47,1556.01 324.72,1556.01 C1.2 C2.2 470.39,1557.9 552.28,1476.01 676.61,1476.01 701.15,1500.55 701.15,1542.98 705.84,1547.66 U1.0
BOOT0: P3.2 U2.44 | length 388.8
  Top Layer w11: v2(1169.29,1114.17) 1169.29,1111.74 1171.26,1109.77 U2.44
  Bottom Layer w20: P3.2 988.19,1295.28 v2(1169.29,1114.17)
GND: C1.1 C2.1 C3.1 C4.1 C5.1 C6.1 C7.1 C8.1 C9.1 C10.1 C11.1 C12.1 C13.1 C14.1 C15.1 D1.K P1.1 P2.4 P3.3 R4.2 R6.2 R8.2 R10.2 R12.2 R14.2 R16.2 R18.2 R20.2 R22.2 R24.2 R26.2 R28.2 R30.2 R32.2 R34.2 R36.2 R38.2 R40.2 R42.2 R44.2 R46.2 R48.2 R50.2 R52.2 R54.2 R56.2 R58.2 R60.2 R62.2 S1.1 U1.1 U2.8 U2.23 U2.35 U2.47 Y1.2 Y1.4 | length 7464.8
  Top Layer w11: U2.8 1108.27,848.43 v2(1127.95,828.74) ; U2.47 1112.36,1037.25 1112.36,988.5 1124.02,976.84 v2(1124.02,974.41) ; v2(1277.56,801.18) 1277.56,798.75 1289.37,786.93 U2.23 ; v2(1277.56,958.66) 1279.99,958.66 1287.87,966.54 U2.35
  Top Layer w20: Y1.4 791.83,808.57 791.83,763.84 803.54,752.13 C12.1 ; Y1.4@783.46,820.87 Y1.2@849.75,902.9 ; C13.1 840.24,964.57 840.39,964.41 840.39,962.76 851.79,951.36 851.79,910.02 Y1.2
  Top Layer w25: Y1.2 854.33,903.54 899.61,903.54 v2(909.45,893.7)
  Top Layer w30: P1.1 C1.1 C2.1 C3.1 600.39,1676.01 648.46,1724.08 702.87,1724.08 U1.1 791.57,1728.77 v2(791.71,1728.9) ; R4.2 303.54,106.3 v1(464.57,106.3) ; R6.2@303.54,206.3 v1(464.57,206.3) ; R8.2@303.54,306.3 v1(464.57,306.3) ; R10.2@303.54,406.3 v1(464.57,406.3) ; R12.2@303.54,506.3 v1(464.57,506.3) ; R14.2@303.54,606.3 v1(464.57,606.3) ; R16.2@303.54,706.3 v1(464.57,706.3) ; R18.2@303.54,806.3 v1(464.57,806.3) ; R20.2@303.54,906.3 v1(464.57,906.3) ; R22.2@303.54,1006.3 v1(464.57,1006.3) ; R24.2@303.54,1106.3 v1(464.57,1106.3) ; R26.2@303.54,1206.3 v1(464.57,1206.3) ; R28.2@303.54,1306.3 v1(464.57,1306.3) ; R30.2@303.54,1406.3 v1(464.57,1406.3) ; v2(1130.43,1489.79) D1.K@1130.43,1567.5 ; v1(1692.91,98.43) R32.2 ; v1(1692.91,198.43) R34.2@1883.86,198.43 ; v1(1692.91,298.43) R36.2@1883.86,298.43 ; v1(1692.91,398.43) R38.2@1883.86,398.43 ; v1(1692.91,498.43) R40.2@1883.86,498.43 ; v1(1692.91,598.43) R42.2 ; v1(1692.91,698.43) R44.2@1883.86,698.43 ; v1(1692.91,798.43) R46.2@1883.86,798.43 ; v1(1692.91,898.43) R48.2@1883.86,898.43 ; v1(1692.91,998.43) 1694.49,1000 1879.17,1000 1880.75,998.43 R50.2@1883.86,998.43 ; v1(1692.91,1098.43) R52.2 ; v1(1692.91,1198.43) R54.2@1883.86,1198.43 ; v1(1692.91,1298.43) R56.2@1883.86,1298.43 ; v1(1692.91,1398.43) R58.2@1883.86,1398.43 ; v1(1692.91,1498.43) R60.2@1883.86,1498.43 ; v1(1692.91,1598.43) R62.2
  Bottom Layer w11: v2(627.95,1045.28) v2@628.46,1045.79 ; v2(627.95,1088.58) v2@628.46,1089.09 ; C15.1@670.28,1045.79 C15.1 ; C14.1@670.28,1089.09 C14.1 ; C6.1 C6.1@1094.49,1009.84 ; v2@1122.29,982.04 1122.29,976.13 v2(1124.02,974.41)
  Bottom Layer w20: v2@628.46,1045.79 C15.1@670.28,1045.79 ; v2@628.46,1089.09 C14.1@670.28,1089.09 ; C15.1 C14.1 ; C9.1 v2@1127.56,777.95 ; C11.1 v2@1126.14,882.05 ; C10.1 v2(1127.95,828.74) ; C6.1@1094.49,1009.84 v2@1122.29,982.04 ; v2(1277.56,801.18) 1277.56,775.59 1307.09,746.06 C8.1 C8.1@1309.33,745.79 ; v2(1277.56,958.66) 1297.4,978.5 1326.93,978.5 1332.68,984.25 C5.1 C5.1@1332.95,986.5 ; C4.1@1332.95,1037.68 C4.1 1333.23,1039.92 1389.76,1096.46 v2(1389.76,1102.36) ; C7.1@1360.51,745.79 C7.1
  Bottom Layer w30: C9.1 1068.62,778.23 1068.62,828.46 C10.1 1068.7,828.94 1068.7,881.85 C11.1 ; v2@1126.14,882.05 v2(1127.95,883.86) ; v2@1127.56,777.95 v2(1127.95,777.56) ; C8.1@1309.33,745.79 C7.1@1360.51,745.79 ; C5.1@1332.95,986.5 C4.1@1332.95,1037.68
IN/OUT: C12.2 R1.1 Y1.1 | length 132.2
  Top Layer w20: Y1.1 854.33,812.99 882.91,784.41 882.91,752.28 883.07,752.13 C12.2 860.24,708.66 R1.1
NetD1_A: D1.A R2.2 | length 129
  Top Layer w30: D1.A@1203.27,1561.59 R2.2
NetR1_2: R1.2 U2.6 | length 289.8
  Top Layer w11: R1.2 915.51,708.51 915.51,852.52 950.79,887.8 U2.6
NRST: C11.2 S1.2 U2.7 | length 523.1
  Top Layer w11: v2@965.55,867.13 988.42,867.13 ; 989.41,868.11 U2.7
  Bottom Layer w20: S1.2 657.91,879.96 808.09,879.96 857.68,929.54 949.75,929.54 964.57,914.72 v2(964.57,866.14) 999.45,866.14 C11.2@1013.39,880.08
OUT/IN: C13.2 U2.5 Y1.3 | length 368
  Top Layer w11: Y1.3 796.93,920.94 796.93,942.6 799,944.67 799,964.35 803.09,968.44 803.09,984.19 818.9,1000 891.08,1000 983.44,907.64 1041.18,907.64 U2.5
PA0: P4.13 R27.2 R28.1 U2.10 | length 1560.9
  Top Layer w10: R28.1 234.25,1301.18 295.28,1240.16 476.38,1240.16 507.87,1208.66 507.87,1135.66 736.22,907.31 736.22,781.69 841.9,676.01 937.63,676.01 944.07,682.45 944.07,736.31 941.35,739.03 941.35,792.88 963.02,814.56 993.67,814.56 998.83,809.4 1040.99,809.4 U2.10
  Top Layer w30: P4.13 R28.1@234.25,1303.94
  Bottom Layer w30: P4.13 110.63,1303.54 233.86,1303.54 R27.2
PA1: P4.12 R25.2 R26.1 U2.11 | length 1517.3
  Top Layer w10: R26.1 234.25,1202.76 299.21,1137.8 472.44,1137.8 712.6,897.64 712.6,779.53 842.52,649.61 966.58,649.61 972.44,655.46 972.44,753.77 957.35,768.86 957.35,786.26 969.65,798.56 987.04,798.56 996.23,789.37 U2.11
  Top Layer w30: P4.12 R26.1@234.25,1203.94
  Bottom Layer w30: P4.12@109.45,1204.72 R25.2@231.89,1204.72
PA2: P4.11 R23.2 R24.1 U2.12 | length 1410
  Top Layer w11: R24.1 234.25,1100.39 297.55,1037.09 471.25,1037.09 500,1008.34 500,948.82 673.23,775.59 692.91,775.59 838.58,629.92 1015.75,629.92 1041.34,655.51 U2.12
  Top Layer w30: P4.11 R24.1@234.25,1103.94
  Bottom Layer w30: P4.11@109.45,1104.72 R23.2@231.89,1104.72
PA3: P4.10 R21.2 R22.1 U2.13 | length 1360.5
  Top Layer w11: R22.1 234.25,1001.97 301.49,934.73 478.66,934.73 661.42,751.97 688.98,751.97 842.52,598.43 1035.43,598.43 1092.25,655.25 1092.25,718.24 U2.13
  Top Layer w30: P4.10 R22.1
  Bottom Layer w30: P4.10@109.45,1004.72 R21.2@231.89,1004.72
PA4: P4.9 R19.2 R20.1 U2.14 | length 1378.1
  Top Layer w11: R20.1 234.25,899.61 297.55,836.3 477.63,836.3 589.52,724.41 688.98,724.41 849.68,563.71 1040.09,563.71 1112.2,635.83 U2.14
  Top Layer w30: P4.9 R20.1@234.25,903.94
  Bottom Layer w30: P4.9@109.45,904.72 R19.2@231.89,904.72
PA5: P4.8 R17.2 R18.1 U2.15 | length 1397.5
  Top Layer w11: R18.1 234.25,801.18 265.44,770 450.48,770 688.98,531.5 1051.18,531.5 1131.89,612.2 U2.15
  Top Layer w30: P4.8 R18.1@234.25,803.94
  Bottom Layer w30: P4.8@109.45,804.72 R17.2@231.89,804.72
PA6: P4.7 R15.2 R16.1 U2.16 | length 1431.4
  Top Layer w11: R16.1 234.25,702.76 301.49,635.52 472.83,635.52 612.28,496.06 1079.16,496.06 1151.57,568.48 U2.16
  Top Layer w30: P4.7 R16.1@234.25,703.94
  Bottom Layer w30: P4.7 R15.2@232.68,703.94
PA7: P4.6 R13.2 R14.1 U2.17 | length 1481.8
  Top Layer w11: R14.1 234.25,600.39 301.49,533.15 475.19,533.15 567.4,440.94 1090.55,440.94 1171.26,521.65 U2.17
  Top Layer w30: P4.6 R14.1@234.25,603.94
  Bottom Layer w30: P4.6 R13.2@232.68,603.94
PA8: P5.5 R39.2 R40.1 U2.29 | length 1101
  Top Layer w11: U2.29 1458.66,848.43 1507.87,799.21 1507.87,622.05 1665.35,464.57 1917.32,464.57 1950.79,498.03 R40.1
  Top Layer w32: R40.1@1951.18,499.41 P5.5@2066.54,499.41
  Bottom Layer w32: R39.2 1951.18,499.61 2066.54,499.61 P5.5
PA9: P5.6 R41.2 R42.1 U2.30 | length 1028.5
  Top Layer w11: U2.30 1478.35,868.11 1531.5,814.96 1531.5,700.79 1667.01,565.27 1919.6,565.27 1950.79,596.46 R42.1
  Top Layer w32: R42.1@1951.18,599.8 P5.6@2066.54,599.8
  Bottom Layer w30: R41.2@1951.57,599.21 P5.6
PA10: P5.7 R43.2 R44.1 U2.31 | length 956.2
  Top Layer w11: U2.31 1498.03,887.8 1551.18,834.65 1551.18,783.46 1670.95,663.7 1919.6,663.7 1950.79,694.88 R44.1
  Top Layer w32: R44.1@1951.18,698.23 P5.7@2066.54,698.23
  Bottom Layer w32: R43.2@1953.94,700.39 P5.7@2066.54,700.39
PA11: P5.8 R45.2 R46.1 U2.32 | length 895.5
  Top Layer w11: U2.32 1521.65,907.48 1663.07,766.06 1919.6,766.06 1950.79,797.24 R46.1
  Top Layer w32: R46.1@1951.18,798.82 P5.8@2066.54,798.82
  Bottom Layer w32: R45.2@1951.18,799.61 P5.8@2067.32,799.61
PA12: P5.9 R47.2 R48.1 U2.33 | length 861.3
  Top Layer w11: U2.33 1537.4,927.17 1600.08,864.48 1919.6,864.48 1950.79,895.67 R48.1
  Top Layer w32: R48.1@1951.18,900.2 P5.9@2066.54,900.2
  Bottom Layer w32: R47.2@1951.97,898.82 P5.9@2066.54,898.82
PA15: P5.10 R49.2 R50.1 U2.38 | length 1079.5
  Top Layer w11: U2.38 1289.37,1120.08 1318.9,1149.61 1401.57,1149.61 1586.61,964.57 1917.32,964.57 1950.79,998.03 R50.1
  Top Layer w32: R50.1@1951.18,999.61 P5.10@2066.54,999.61
  Bottom Layer w32: R49.2@1951.57,1000 P5.10@2066.93,1000
PB0: P4.5 R11.2 R12.1 U2.18 | length 1526.8
  Top Layer w11: R12.1 234.25,498.03 297.55,434.73 473.61,434.73 518.58,389.76 1102.36,389.76 1190.79,478.19 1190.79,718.35 U2.18
  Top Layer w30: P4.5 R12.1@234.25,503.94
  Bottom Layer w30: P4.5 R11.2@232.68,503.94
PB1: P4.4 R9.2 R10.1 U2.19 | length 1580
  Top Layer w11: R10.1 234.25,399.61 297.55,336.3 1119.77,336.3 1210.63,427.17 U2.19
  Top Layer w30: P4.4 R10.1@234.25,403.94
  Bottom Layer w30: P4.4 R9.2@232.68,403.94
PB2: P4.3 R7.2 R8.1 U2.20 | length 1675
  Top Layer w11: R8.1 234.25,301.18 297.55,237.88 1100.08,237.88 1230.32,368.11 U2.20
  Top Layer w30: P4.3 R8.1@234.25,303.94
  Bottom Layer w30: P4.3 R7.2@232.68,303.94
PB3: P5.11 R51.2 R52.1 U2.39 | length 1080.1
  Top Layer w11: U2.39 1269.69,1135.83 1300.83,1166.97 1447.2,1166.97 1548.9,1065.27 1919.6,1065.27 1950.79,1096.46 R52.1
  Top Layer w32: R52.1@1951.18,1099.02 P5.11@2066.54,1099.02
  Bottom Layer w30: R51.2@1951.57,1099.21 P5.11
PB4: P5.12 R53.2 R54.1 U2.40 | length 1081.9
  Top Layer w11: U2.40 1250,1155.51 1278.46,1183.97 1475.12,1183.97 1495.39,1163.7 1919.6,1163.7 1950.79,1194.88 R54.1
  Top Layer w32: R54.1@1951.18,1199.41 P5.12@2066.54,1199.41
  Bottom Layer w32: R53.2@1953.94,1200.39 P5.12@2066.54,1200.39
PB5: P5.13 R55.2 R56.1 U2.41 | length 1140.7
  Top Layer w11: U2.41 1230.32,1175.2 1256.09,1200.97 1472.62,1200.97 1533.78,1262.12 1919.6,1262.12 1950.79,1293.31 R56.1
  Top Layer w32: R56.1@1951.18,1299.8 P5.13@2066.54,1299.8
  Bottom Layer w32: R55.2@1951.18,1299.61 P5.13@2067.32,1299.61
PB6: P5.14 R57.2 R58.1 U2.42 | length 1205.8
  Top Layer w11: U2.42 1210.63,1183.07 1245.53,1217.97 1465.58,1217.97 1607.69,1360.08 1915.2,1360.08 1950.79,1395.67 R58.1
  Top Layer w32: R58.1@1951.18,1398.23 P5.14@2066.54,1398.23
  Bottom Layer w32: R57.2@1951.97,1398.82 P5.14@2066.54,1398.82
PB7: P5.15 R59.2 R60.1 U2.43 | length 1276.2
  Top Layer w11: U2.43 1190.94,1198.82 1227.09,1234.97 1447.57,1234.97 1671.11,1458.51 1915.2,1458.51 1950.79,1494.09 R60.1
  Top Layer w32: R60.1@1951.18,1498.62 P5.15@2066.54,1498.62
  Bottom Layer w32: R59.2@1951.57,1500 P5.15@2066.93,1500
PB8: P5.16 R61.2 R62.1 U2.45 | length 1384.5
  Top Layer w11: U2.45 1151.57,1101.48 1147.79,1105.27 1147.79,1179.71 1220.05,1251.97 1433.07,1251.97 1649.61,1468.5 1649.61,1523.62 1686.85,1560.87 1915.2,1560.87 1950.79,1596.46 R62.1
  Top Layer w32: R62.1@1951.18,1597.05 P5.16@2066.54,1597.05
  Bottom Layer w30: R61.2@1951.57,1599.21 P5.16
PB9: P4.14 R29.2 R30.1 U2.46 | length 1336.2
  Top Layer w11: R30.1 234.25,1403.54 265.9,1371.89 859.3,1371.89 1131.73,1099.46 1131.73,1037.56 U2.46
  Top Layer w30: P4.14@110.24,1405.51 R30.1
  Bottom Layer w30: P4.14 111.02,1404.72 233.47,1404.72 R29.2
PB10: P4.2 R5.2 R6.1 U2.21 | length 1793.6
  Top Layer w11: R6.1 234.25,202.76 275.91,161.09 295.28,141.73 1125.98,141.73 1250,265.75 U2.21
  Top Layer w30: P4.2 R6.1@234.25,203.94
  Bottom Layer w30: P4.2 R5.2@232.68,203.94
PB11: P4.1 R3.2 R4.1 U2.22 | length 1933.5
  Top Layer w11: R4.1 234.25,101.97 320.47,15.75 1114.17,15.75 1269.69,171.26 U2.22
  Top Layer w30: P4.1 R4.1
  Bottom Layer w30: P4.1 111.02,103.15 233.47,103.15 R3.2
PB12: P5.1 R31.2 R32.1 U2.25 | length 1413.3
  Top Layer w11: U2.25 1360.24,710.44 1397.64,673.04 1397.64,330.71 1720.47,7.87 1862.2,7.87 1950.79,96.46 R32.1
  Top Layer w32: R32.1 1951.18,98.82 P5.1 P5.1@2066.54,98.82
  Bottom Layer w30: R31.2 1951.18,98.82 2066.54,98.82 P5.1
PB13: P5.2 R33.2 R34.1 U2.26 | length 1330.6
  Top Layer w11: U2.26 1360.39,789.22 1403.7,789.22 1429.13,763.78 1429.13,409.45 1707,131.58 1883.55,131.58 1950.79,198.82 R34.1
  Top Layer w32: R34.1@1951.18,200.2 P5.2@2066.54,200.2
  Bottom Layer w32: R33.2 1953.54,200 2066.14,200 P5.2
PB14: P5.3 R35.2 R36.1 U2.27 | length 1257.2
  Top Layer w11: U2.27 1419.29,809.06 1456.69,771.65 1456.69,480.32 1700.79,236.22 1889.76,236.22 1950.79,297.24 R36.1
  Top Layer w32: R36.1@1951.18,299.61 P5.3@2066.54,299.61
  Bottom Layer w32: R35.2 P5.3
PB15: P5.4 R37.2 R38.1 U2.28 | length 1192.6
  Top Layer w11: U2.28 1438.98,828.74 1484.25,783.46 1484.25,551.18 1703.07,332.37 1887.48,332.37 1950.79,395.67 R38.1
  Top Layer w32: R38.1@1951.18,399.02 P5.4@2066.54,399.02
  Bottom Layer w32: R37.2 1951.57,398.43 2066.14,398.43 P5.4
SWCLK: P2.3 U2.37 | length 343.3
  Top Layer w11: U2.37 1309.06,1089.33 1320.36,1100.64 1328.99,1100.64 v2(1330.71,1102.36)
  Bottom Layer w20: v2(1330.71,1102.36) 1370.08,1141.73 P2.3
SWDIO: P2.2 U2.34 | length 548.4
  Top Layer w11: U2.34 1458.66,946.85 v2(1496.06,984.25)
  Bottom Layer w20: P2.2 1421.26,1133.86 1496.06,1059.06 v2(1496.06,984.25)
pads on no net: U2.1 U2.2

## Polygon pours and split planes (outlines as drawn)
GND on GND Layer (split plane): 2161.01,-15.34 20.1,-15.34 20.1,1790.93 2161.01,1790.93
+3.3V on 3V3 (split plane): 2161.01,-15.34 20.1,-15.34 20.1,1790.93 2161.01,1790.93

## Keep-outs
Keep-Out Layer:
  the board outline again, w30

## Silkscreen, mask and mechanical layers (free items; w line width, h text height)
Top Overlay:
  text "PB8" at 1722.6,1577.76 h60
  text "PB7" at 1722.6,1475.31 h60
  text "PB9" at 352.52,1388.67 h60
  text "PB6" at 1722.6,1377.66 h60
  text "PA0" at 351.66,1285.31 h60
  text "3V3" at 900.54,1285.28 h60 r270
  text "Boot0" at 971.38,1285.28 h60 r270
  text "GND" at 1042.27,1285.28 h60 r270
  text "GND" at 1278.49,1285.28 h60 r270
  text "SWCLK" at 1349.3,1285.28 h60 r270
  text "SWDIO" at 1416.29,1285.28 h60 r270
  text "3V3" at 1487.15,1285.28 h60 r270
  text "PB5" at 1722.6,1278.49 h60
  text "PA1" at 351.66,1186.1 h60
  text "PB4" at 1722.6,1176.2 h60
  text "PA2" at 352.52,1084.8 h60
  text "PB3" at 1722.6,1078.44 h60
  text "PA3" at 352.52,987.15 h60
  text "PA15" at 1710.79,983.22 h60
  text "PA4" at 351.66,883.07 h60
  text "PA12" at 1706.85,880.08 h60
  text "PA5" at 352.52,786.37 h60
  text "PA11" at 1710.79,781.65 h60
  text "PA6" at 351.66,682.94 h60
  text "PA10" at 1710.79,680.07 h60
  text "PA7" at 351.66,583.74 h60
  text "PA9" at 1710.79,582.33 h60
  text "PA8" at 1710.79,484.01 h60
  text "PB0" at 352.52,483.22 h60
  text "MCU STM32" at 874.33,386.14 h60
  text "PB1" at 351.66,379.02 h60
  text "PB15" at 1710.79,377.66 h60
  text "PB14" at 1706.85,281.76 h60
  text "PB2" at 351.66,280.59 h60
  text "GPIO INTERFACE" at 724.72,260.16 h60
  text "PB10" at 352.52,187.94 h60
  text "PB13" at 1710.79,180.07 h60
  text "PB11" at 351.66,83.74 h60
  text "PB12" at 1706.85,80.87 h60
  text "EA2EZG" at 963.82,46.5 h60